# Altium PCB PCB1.PcbDoc
Units mm, origin at the board's own origin, x right, y up, seen from the top; angles counter-clockwise.
Board outline 101.98 x 46.48 mm, 2 copper layers (Top Layer, Bottom Layer); 139 components, 82 nets, 451 pads, 102 vias.
Unrouted connection lines stored in the file: 4.
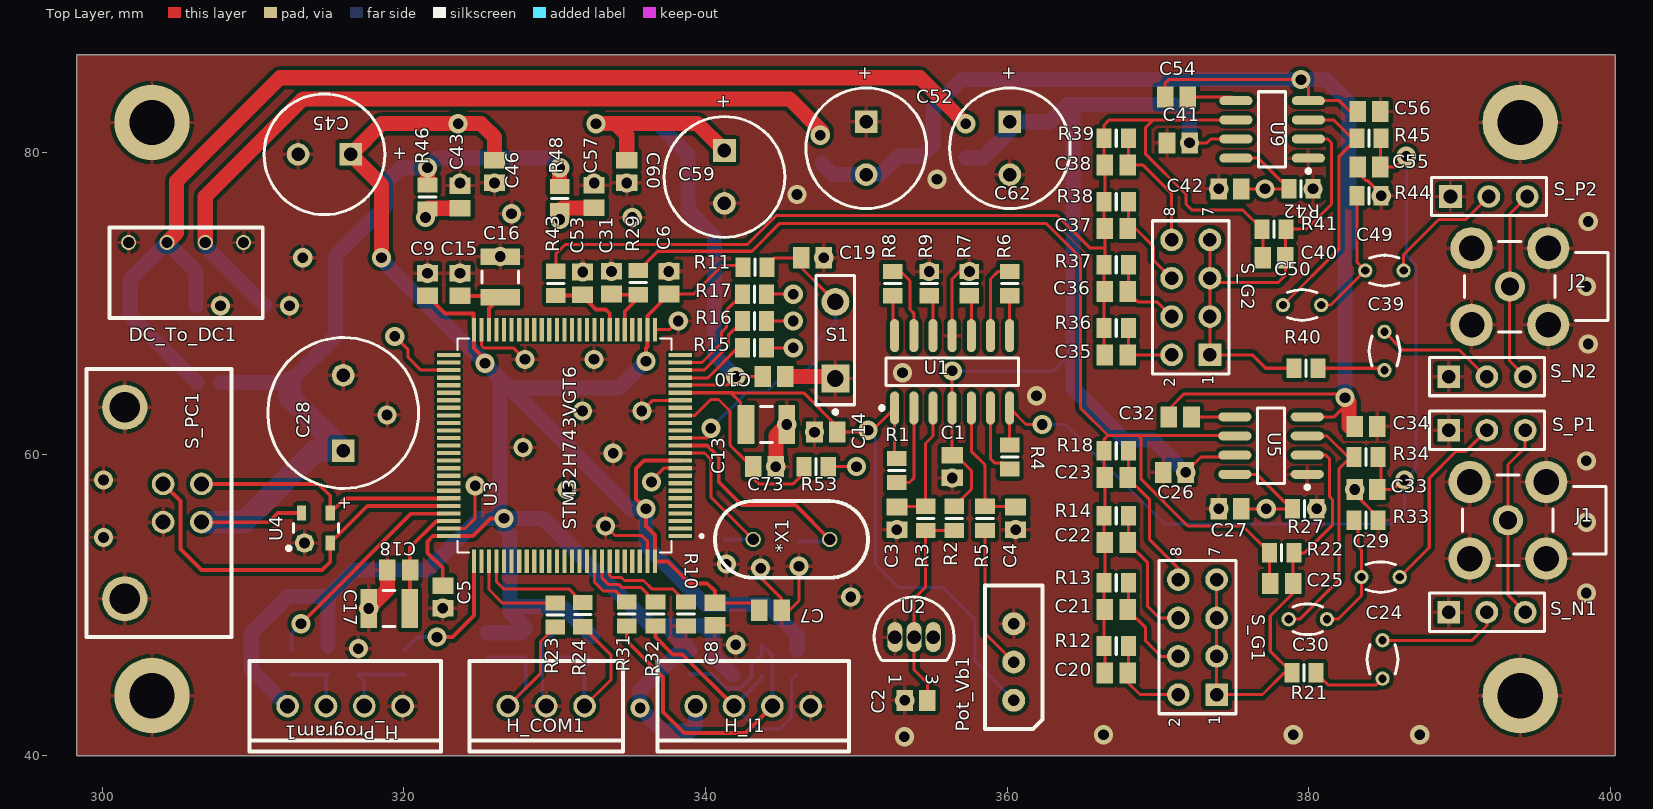
[diagram p0: Top Layer view]
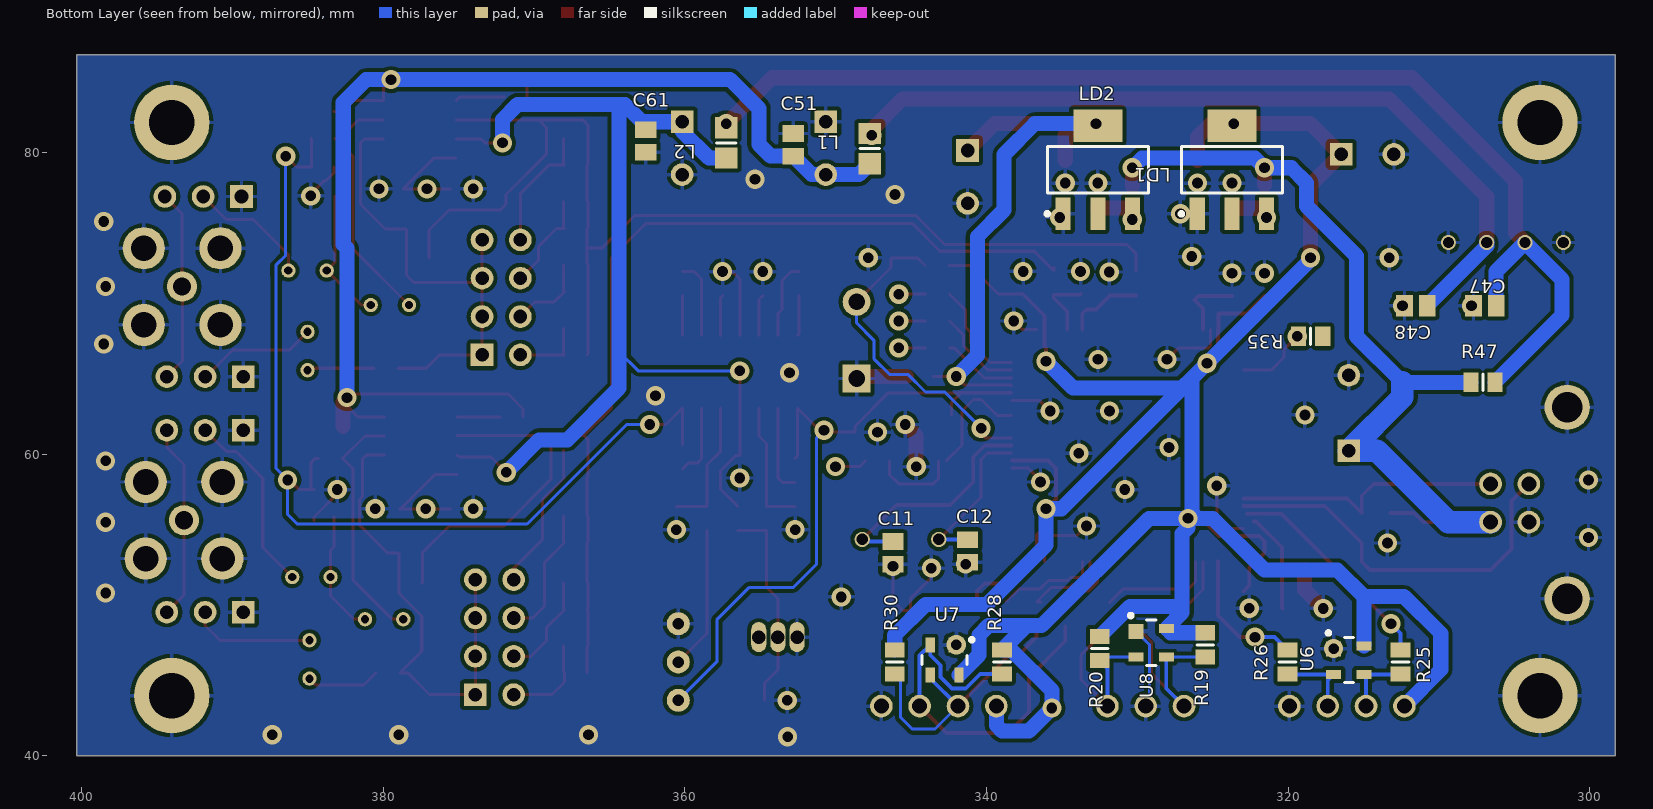
[diagram p1: Bottom Layer view, seen from below]

## Layer stack, top to bottom
Top Solder: solder mask 0.0102, Solder Resist, Dk 3.5
Top Layer: signal copper 0.0356
Dielectric 1: dielectric 0.32, FR-4, Dk 4.8
Bottom Layer: signal copper 0.0356
Bottom Solder: solder mask 0.0102, Solder Resist, Dk 3.5

## Board outline
298.323,40.005 298.323,86.487 400.304,86.487 400.304,40.005

## Design rules (kind name [scope] priority, off if disabled: settings)
Clearance Clearance_1 [HasFootprint('QFP50P1600X1600X160-100N')] p1: gap=0.15 ignorepadtopadclearanceinfootprint=FALSE
Clearance [All] p2: gap=0.254 ignorepadtopadclearanceinfootprint=FALSE except(0: Arc-Hole Track-Hole SMDPad-Hole THPad-Hole Via-Hole Fill-Hole Poly-Hole Region-Hole Text-Hole)
PolygonConnect [All] p1: connectstyle=Relief reliefconductorwidth=0.254 reliefentries=4 polygonreliefangle="90 Angle" airgapwidth=0.254
RoomDefinition Sheet1 [InComponentClass('Sheet1')] p1: confinementstyle=ConfineIn formatcopy=TRUE lockcomponents=FALSE outline 298.335,40.005 400.316,40.005 400.316,86.487 298.335,86.487
RoutingVias [All] p1: holewidth=0.711 width=1.27 viastyle="Through Hole" minholewidth=0.711 minwidth=1.27 maxholewidth=0.711 maxwidth=1.27
SolderMaskExpansion [All] p1: expansion=0.102
Width [All] p1: maxlimit=1.5 minlimit=0.2 preferedwidth=1
30 further rules are at their usual default settings.

## Components (designator, comment, footprint, x,y, rotation, side; value= is the part's Value field where it differs from the comment)
*X1 "XTAl_Large" XTAL_Large 348.246,54.356 r180 top
C1 "Bipolar" C0805 356.362,59.182 r90 top value=100nF
C2 "Bipolar" C0805 353.961,43.688 r0 top value=100nF
C3 "Bipolar" C0805 352.691,55.753 r90 top value=1uF
C4 "Bipolar" C0805 360.565,55.753 r90 top value=100nF
C5 "Bipolar" C0805 322.592,50.546 r90 top value=100nF
C6 "Bipolar" C0805 337.578,71.374 r270 top value=100nF
C7 "Bipolar" C0805 344.309,49.657 r180 top value=100nF
C8 "Bipolar" C0805 340.626,49.403 r90 top value=100nF
C9 "Bipolar" C0805 321.576,71.247 r270 top value=100nF
C10 "Bipolar" C0805 344.551,65.151 r180 top value=100nF
C11 "Bipolar" C0805 346.214,53.467 r90 bottom value=10pF
C12 "Bipolar" C0805 341.261,53.594 r90 bottom value=10pF
C13 "Tan" C1210 344.043,61.976 r180 top value=2.2uF
C14 "Bipolar" C0805 347.98,61.468 r0 top value=100nF
C15 "Bipolar" C0805 323.735,71.247 r270 top value=100nF
C16 "Tan" C1210 326.402,71.755 r270 top value=2.2uF
C17 "Tan" C1210 319.036,49.784 r0 top value=2.2uF
C18 "Bipolar" C0805 319.671,52.324 r0 top value=100nF
C19 "Bipolar" C0805 347.091,73.025 r180 top value=100pF
C20 "Bipolar" C0805 367.235,45.51 r180 top value=100pF
C21 "Bipolar" C0805 367.235,49.701 r180 top value=47pF
C22 "Bipolar" C0805 367.235,54.146 r180 top value=20pF
C23 "Bipolar" C0805 367.235,58.464 r180 top value=10pF
C24 "Bipolar" HA-N3 384.888,46.399 r270 top value=10uF
C25 "Bipolar" C0805 378.206,51.435 r180 top value=4.7pF
C26 "Bipolar" C0805 371.094,58.801 r0 top value=100nF
C27 "Bipolar" C0805 374.777,56.388 r0 top value=100nF
C28 "94SA107X0020FBP" F 315.988,62.738 r90 top value=100uF
C29 "Bipolar" HA-N3 384.761,51.86 r180 top value=10uF
C30 "Bipolar" HA-N3 379.935,49.066 r180 top value=10uF
C31 "Bipolar" C0805 333.768,71.374 r270 top value=100pF
C32 "Bipolar" C0805 371.475,62.484 r0 top value=2.2pF
C33 "Bipolar" C0805 383.794,57.658 r0 top value=100nF
C34 "Bipolar" C0805 383.794,61.849 r0 top value=100nF
C35 "Bipolar" C0805 367.235,66.592 r180 top value=100pF
C36 "Bipolar" C0805 367.235,70.783 r180 top value=47pF
C37 "Bipolar" C0805 367.235,74.974 r180 top value=20pF
C38 "Bipolar" C0805 367.235,79.165 r180 top value=10pF
C39 "Bipolar" HA-N3 385.015,66.846 r270 top value=10uF
C40 "Bipolar" C0805 377.698,73.025 r180 top value=4.7pF
C41 "Bipolar" C0805 371.348,80.645 r0 top value=100nF
C42 "Bipolar" C0805 374.777,77.597 r0 top value=100nF
C43 "SMD" C0805 323.735,77.063 r90 top value=100nf
C45 "470uf/10v" CAPPR3.5-8X11.5 314.746,79.883 r180 top value=470uF
C46 "SMD" C0805 326.021,78.74 r270 top value=100nf
C47 "Bipolar" C0805 306.971,69.85 r180 bottom value=100nF
C48 "Bipolar" C0805 311.543,69.85 r180 bottom value=100nF
C49 "Bipolar" HA-N3 385.015,72.18 r180 top value=10uF
C50 "Bipolar" HA-N3 379.554,69.894 r180 top value=10uF
C51 "Bipolar" C0805 352.818,80.518 r270 bottom value=100nF
C52 "470uf/10v" CAPPR3.5-8X11.5 350.659,80.292 r270 top value=470uF
C53 "Bipolar" C0805 331.863,71.336 r270 top value=100pF
C54 "Bipolar" C0805 371.221,83.693 r0 top value=2.2pF
C55 "Bipolar" C0805 383.999,79.038 r0 top value=100nF
C56 "Bipolar" C0805 383.999,82.721 r0 top value=100nF
C57 "SMD" C0805 332.625,77.089 r90 top value=100nf
C59 "470uf/10v" CAPPR3.5-8X11.5 341.261,78.387 r270 top value=470uF
C60 "SMD" C0805 334.784,78.74 r270 top value=100nf
C61 "Bipolar" C0805 362.597,80.772 r90 bottom value=100nF
C62 "470uf/10v" CAPPR3.5-8X11.5 360.184,80.292 r270 top value=470uF
C73 "Bipolar" C0805 343.916,59.182 r180 top value=100pF
DC_To_DC1 "DC_To_DC" DC_To_DC 301.764,74.041 r0 top
H_COM1 "Header_3Pin" Header_3Pin 331.99,43.307 r180 top
H_I1 "Header_4Pin" Header_4Pin 346.976,43.307 r180 top
H_Program1 "Header_4Pin" Header_4Pin 319.925,43.307 r180 top
J1 "COAX-F" MCX5.08-H5 393.204,55.626 r180 top
J2 "COAX-F" MCX5.08-H5 393.331,71.12 r180 top
L1 "Inductor" 6-0805_M 347.738,80.264 r270 bottom value=10uH
L2 "Inductor" 6-0805_M 357.263,80.645 r270 bottom value=10uH
LD1 "LD33" SOT230P 323.735,78.863 r90 bottom
LD2 "LD33" SOT230P 332.625,78.867 r90 bottom
Pot_Vb1 "10k" MultiTurn 360.438,43.688 r90 top
R1 "Res1" 6-0805_L 352.691,58.928 r90 top value=4.7K
R2 "Res1" 6-0805_L 356.501,55.753 r90 top value=10K
R3 "Res1" 6-0805_L 354.596,55.753 r90 top value=4.7K
R4 "Res1" 6-0805_L 360.172,59.817 r90 top value=4.7K
R5 "Res1" 6-0805_L 358.533,55.753 r90 top value=4.7K
R6 "Res1" 6-0805_L 360.167,71.31 r270 top value=4.7K
R7 "Res1" 6-0805_L 357.5,71.31 r270 top value=4.7K
R8 "Res1" 6-0805_L 352.42,71.31 r270 top value=4.7K
R9 "Res1" 6-0805_L 354.833,71.31 r270 top value=4.7K
R10 "Res1" 6-0805_L 338.709,49.403 r270 top value=47K
R11 "Res1" 6-0805_L 343.281,72.39 r180 top value=10K
R12 "Res1" 6-0805_L 367.235,47.288 r180 top value=1K
R13 "Res1" 6-0805_L 367.235,51.479 r180 top value=2.2K
R14 "Res1" 6-0805_L 367.235,55.924 r180 top value=4.7K
R15 "Res1" 6-0805_L 343.255,67.056 r180 top value=330
R16 "Res1" 6-0805_L 343.255,68.834 r180 top value=330
R17 "Res1" 6-0805_L 343.255,70.612 r180 top value=330
R18 "Res1" 6-0805_L 367.235,60.242 r180 top value=10K
R19 "Res1" 6-0805_L 325.513,47.371 r90 bottom value=10k
R20 "Res1" 6-0805_L 332.498,47.117 r90 bottom value=10k
R21 "Res1" 6-0805_L 379.681,45.51 r180 top value=1K
R22 "Res1" 6-0805_L 378.206,53.467 r180 top value=20K
R23 "Res1" 6-0805_L 330.041,49.342 r270 top value=330
R24 "Res1" 6-0805_L 331.863,49.365 r270 top value=330
R25 "Res1" 6-0805_L 312.559,46.228 r90 bottom value=330
R26 "Res1" 6-0805_L 320.052,46.228 r90 bottom value=330
R27 "Res1" 6-0805_L 379.73,56.388 r180 top value=10K
R28 "Res1" 6-0805_L 338.975,46.228 r90 bottom value=4.7k
R29 "Res1" 6-0805_L 335.546,71.374 r90 top value=100
R30 "Res1" 6-0805_L 346.087,46.228 r90 bottom value=4.7k
R31 "Res1" 6-0805_L 334.784,49.403 r90 top value=330
R32 "Res1" 6-0805_L 336.689,49.403 r90 top value=330
R33 "Res1" 6-0805_L 383.794,55.626 r180 top value=1K
R34 "Res1" 6-0805_L 383.794,59.817 r180 top value=10K
R35 "Res1" 6-0805_L 318.516,67.818 r0 bottom value=330
R36 "Res1" 6-0805_L 367.235,68.37 r180 top value=1K
R37 "Res1" 6-0805_L 367.235,72.561 r180 top value=2.2K
R38 "Res1" 6-0805_L 367.235,76.752 r180 top value=4.7K
R39 "Res1" 6-0805_L 367.235,80.943 r180 top value=10K
R40 "Res1" 6-0805_L 379.808,65.703 r180 top value=1K
R41 "Res1" 6-0805_L 377.698,74.93 r180 top value=20K
R42 "Res1" 6-0805_L 379.476,77.597 r180 top value=10K
R43 "Res1" 6-0805_L 330.085,71.336 r90 top value=100
R44 "Res1" 6-0805_L 383.999,77.133 r180 top value=1K
R45 "Res1" 6-0805_L 383.999,80.943 r180 top value=10K
R46 "Res1" 6-0805_L 321.576,77.063 r270 top value=0
R47 "Res1" 6-0805_L 307.098,64.77 r180 bottom value=0
R48 "Res1" 6-0805_L 330.339,76.962 r270 top value=0
R53 "Res1" 6-0805_L 347.345,59.182 r0 top value=100
S1 "SW-PB" SPST-2 348.615,67.564 r90 top
S_G1 "Gain_Selector" HDR2X4 373.888,44.069 r90 top
S_G2 "Gain_Selector" HDR2X4 373.446,66.592 r90 top
S_N1 "Input_Selector" HDR1X3 389.267,49.53 r0 top
S_N2 "Input_Selector" HDR1X3 389.267,65.151 r0 top
S_P1 "Input_Selector" HDR1X3 389.267,61.595 r0 top
S_P2 "Input_Selector" HDR1X3 389.394,77.089 r0 top
S_PC1 "USB_Type_B" USB_Type_B 306.59,55.499 r270 top
U1 "LM324AD" SO14_N 356.357,65.468 r90 top
U2 "LM336BZ_2V5" TO92 353.834,47.879 r270 top
U3 "STM32H743VGT6" QFP50P1600X1600X160-100N 330.653,60.579 r180 top
U4 "PRTR5V" SOT143L 314.179,55.118 r90 top
U5 "AD8021" SO8_N 377.5,60.579 r180 top
U6 "PRTR5V" SOT143L 315.988,46.355 r180 bottom
U7 "PRTR5V" SOT143L 342.785,46.355 r270 bottom
U8 "PRTR5V" SOT143L 329.085,47.51 r180 bottom
U9 "AD8021" SO8_N 377.571,81.534 r180 top

## Footprints (in the part's own frame and the unit in brackets; to place one, negate y for a bottom-side part, rotate by r counter-clockwise, add the part's x,y. Pads: shape width x height; smd on the part's side, far side on the other; paste and mask are expansions set on the pad)
6-0805_L [mm] "Chip Resistor, Body 2.0x1.2mm, IPC High Density"
  rect 1x1.3 smd: 1(-0.8,0) 2(0.8,0)
  silkscreen extent 0,-0.55 0,0.55, body extent -1.07,-0.7 1.07,0.7, height 0.7
6-0805_M [mm] "Chip Resistor, Body 2.0x1.2mm, IPC Low Density"
  rect 1.4x1.5 smd: 1(-1,0) 2(1,0)
  silkscreen extent 0,-0.65 0,0.65, body extent -1.07,-0.7 1.07,0.7, height 0.7
C0805 [mm] "Chip Capacitor, Body 2.0x1.3mm, IPC High Density"
  rect 1.1x1.4 smd: 1(-0.75,0) 2(0.75,0)
  body extent -1.1,-0.72 1.1,0.72, height 1.4
C1210 [mm] "Chip Capacitor, Body 3.2x2.5mm, IPC High Density"
  rect 1.1x2.6 smd: 1(-1.35,0) 2(1.35,0)
  silkscreen extent -0.4,-1.2 0.4,1.2, body extent -1.7,-1.35 1.7,1.35, height 1.3
CAPPR3.5-8X11.5 [mm] "Capacitor, Electrolytic, Radial; Body 8 x 11.5 mm (Dia.xH typ); Pin Spacing 3.5 mm (typ)"
  rect 1.5x1.5 hole 0.9: 1(-1.75,0)
  round 1.5 hole 0.9: 2(1.75,0)
  silkscreen extent -4,-4 4,4
DC_To_DC [mm]
  round 1 hole 0.75: 0(0,0) 1(2.54,0) 2(5.08,0) 3(7.62,0)
  silkscreen extent -1.27,-5 8.89,1
F [mm] "Capacitor, Electrolytic, Radial; Body 10 x 10.5 mm (Dia.xH typ); Pin Spacing 5 mm (typ)"
  rect 1.5x1.5 hole 0.9: 1(-2.5,0)
  round 1.5 hole 0.9: 2(2.5,0)
  silkscreen extent -5,-5 5,5
HA-N3 [mm] "Capacitor, Radial, Tantalum, Non-Polarised; Body 3.56 x 2.03 x 5.08 mm (WxTxH max); Pin Spacing 2.54 mm (typ)"
  round 0.95 hole 0.55: 1(-1.27,0) 2(1.27,0)
  silkscreen extent -0.98,-1.02 0.98,1.02
HDR1X3 [mm] "Connector; Header; 3 Position"
  rect 1.5x1.5 hole 0.9: 1(0,0)
  round 1.5 hole 0.9: 2(2.54,0) 3(5.08,0)
  silkscreen extent -1.27,-1.27 6.35,1.27
HDR2X4 [mm] "Connector; Header; 4x2 Position"
  rect 1.5x1.5 hole 0.9: 1(0,0)
  round 1.5 hole 0.9: 2(0,2.54) 3(2.54,0) 4(2.54,2.54) 5(5.08,0) 6(5.08,2.54) 7(7.62,0) 8(7.62,2.54)
  silkscreen extent -1.27,-1.27 8.89,3.81
Header_3Pin [mm]
  round 1.5 hole 1: 0(0,0) 1(2.54,0) 2(5.08,0)
  silkscreen extent -2.54,-3 7.62,3
Header_4Pin [mm]
  round 1.5 hole 1: 0(0,0) 1(2.54,0) 2(5.08,0) 3(7.62,0)
  silkscreen extent -2.54,-3 10.16,3
MCX5.08-H5 [mm] "Connector; RF Coaxial, MCX, Thru-Hole; 5 Position; Right-Angle"
  round 2 hole 1.2: 1(0,0)
  round 2.8 hole 1.7: 2(-2.54,-2.54) 3(2.54,-2.54) 4(2.54,2.54) 5(-2.54,2.54)
  silkscreen extent -6.5,-3 3,3
MultiTurn [mil] "Right"
  round 60 hole 30: 0(0,0) 1(100,0) 2(200,0)
  silkscreen extent -75,-75 300,75
QFP50P1600X1600X160-100N [mm]
  rrect7% 1.56x0.28 smd: 1(-7.68,6) 2(-7.68,5.5) 3(-7.68,5) 4(-7.68,4.5) 5(-7.68,4) 6(-7.68,3.5) 7(-7.68,3) 8(-7.68,2.5) 9(-7.68,2) 10(-7.68,1.5) 11(-7.68,1) 12(-7.68,0.5) 13(-7.68,0) 14(-7.68,-0.5) 15(-7.68,-1) 16(-7.68,-1.5) 17(-7.68,-2) 18(-7.68,-2.5) 19(-7.68,-3) 20(-7.68,-3.5) 21(-7.68,-4) 22(-7.68,-4.5) 23(-7.68,-5) 24(-7.68,-5.5) 25(-7.68,-6) 51(7.68,-6) 52(7.68,-5.5) 53(7.68,-5) 54(7.68,-4.5) 55(7.68,-4) 56(7.68,-3.5) 57(7.68,-3) 58(7.68,-2.5) 59(7.68,-2) 60(7.68,-1.5) 61(7.68,-1) 62(7.68,-0.5) 63(7.68,0) 64(7.68,0.5) 65(7.68,1) 66(7.68,1.5) 67(7.68,2) 68(7.68,2.5) 69(7.68,3) 70(7.68,3.5) 71(7.68,4) 72(7.68,4.5) 73(7.68,5) 74(7.68,5.5) 75(7.68,6)
  rrect7% 0.28x1.56 smd: 26(-6,-7.68) 27(-5.5,-7.68) 28(-5,-7.68) 29(-4.5,-7.68) 30(-4,-7.68) 31(-3.5,-7.68) 32(-3,-7.68) 33(-2.5,-7.68) 34(-2,-7.68) 35(-1.5,-7.68) 36(-1,-7.68) 37(-0.5,-7.68) 38(0,-7.68) 39(0.5,-7.68) 40(1,-7.68) 41(1.5,-7.68) 42(2,-7.68) 43(2.5,-7.68) 44(3,-7.68) 45(3.5,-7.68) 46(4,-7.68) 47(4.5,-7.68) 48(5,-7.68) 49(5.5,-7.68) 50(6,-7.68) 76(6,7.68) 77(5.5,7.68) 78(5,7.68) 79(4.5,7.68) 80(4,7.68) 81(3.5,7.68) 82(3,7.68) 83(2.5,7.68) 84(2,7.68) 85(1.5,7.68) 86(1,7.68) 87(0.5,7.68) 88(0,7.68) 89(-0.5,7.68) 90(-1,7.68) 91(-1.5,7.68) 92(-2,7.68) 93(-2.5,7.68) 94(-3,7.68) 95(-3.5,7.68) 96(-4,7.68) 97(-4.5,7.68) 98(-5,7.68) 99(-5.5,7.68) 100(-6,7.68)
  silkscreen extent -9.2,-7.1 7.1,7.1, body extent -8,-8 8,8, height 0.72
SO8_N [mm] "SOIC, 8-Leads, Body 4.9x3.9mm, Pitch 1.27mm, IPC Medium Density"
  oval 2.2x0.6 smd: 1(-2.4,1.905) 2(-2.4,0.635) 3(-2.4,-0.635) 4(-2.4,-1.905) 5(2.4,-1.905) 6(2.4,-0.635) 7(2.4,0.635) 8(2.4,1.905)
  silkscreen extent -2.53,-2.5 0.9,2.88, body extent -1.95,-2.45 1.95,2.45, height 1.75
SO14_N [mm] "SOIC, 14-Leads, Body 8.7x3.9mm, Pitch 1.27mm, IPC Medium Density"
  oval 2.2x0.6 smd: 1(-2.4,3.81) 2(-2.4,2.54) 3(-2.4,1.27) 4(-2.4,0) 5(-2.4,-1.27) 6(-2.4,-2.54) 7(-2.4,-3.81) 8(2.4,-3.81) 9(2.4,-2.54) 10(2.4,-1.27) 11(2.4,0) 12(2.4,1.27) 13(2.4,2.54) 14(2.4,3.81)
  silkscreen extent -2.52,-4.4 0.9,4.78, body extent -1.95,-4.33 1.95,4.33, height 1.75
SOT143L [mm] "SOT143, 4-Leads, Body 2.9x1.3mm, Pitch 1.9mm, Lead Span 2.5mm, IPC High Density"
  rect 1x1 smd: 1(-1,0.75)
  rect 1x0.6 smd: 2(-1,-0.95) 3(1,-0.95) 4(1,0.95)
  silkscreen extent -1.47,-1.5 0.3,1.92, body extent -0.7,-1.52 0.7,1.52, height 1.1
SOT230P [mm] "SOT223, 4-Leads, Body 6.50x7.00mm (avg), Pitch 2.30mm, IPC Medium Density"
  rect 2.15x1 smd: 1(-2.925,2.3) 2(-2.925,0) 3(-2.925,-2.3)
  rect 2.15x3.25 smd: 4(2.925,0)
  silkscreen extent -3.05,-3.35 1.55,3.48, body extent -1.85,-3.35 1.85,3.35, height 1.8
SPST-2 [mm] "Switch; 2 Leads"
  rect 1.85x1.85 hole 1.1: 1(-2.54,0)
  round 1.85 hole 1.1: 2(2.54,0)
  silkscreen extent -4.89,-1.27 4.28,1.27
TO92 [mm] "TO, Flat Index; 3 In-Line, Axial Leads; Body Dia. 4.8mm; Leads 0.51 x 0.51 mm (max)"
  oval 2x1 hole 0.9: 1(0,-1.27) 2(0,0) 3(0,1.27)
  silkscreen extent -2.65,-2.65 1.55,2.65
USB_Type_B [mm]
  round 1.5 hole 1: 0(0,0) 1(-2.54,0) 2(-2.54,-2.54) 3(0,-2.54)
  round 3 hole 2: 4(5.08,-5.08) 5(-7.62,-5.08)
  silkscreen extent -10.16,-7.62 7.62,2
XTAL_Large [mil]
  round 40 hole 30: 0(0,0) 1(200,0)
  silkscreen extent -100,-100 300,100

## Part data
C1 C2 C3 C4 C5 C6 C7 C8 C9 C10 C11 C12 C13 C14 C15 C16 C17 C18 C19 C20 C21 C22 C23 C24 C25 C26 C27 C29 C30 C31 C32 C33 C34 C35 C36 C37 C38 C39 C40 C41 C42 C47 C48 C49 C50 C51 C53 C54 C55 C56 C61 C73: library part Cap, "Capacitor", LatestRevisionDate=17-Jul-2002, LatestRevisionNote="Re-released for DXP Platform.", PackageDescription="Radial Cap, Thru-Hole; 2 Leads; 0.3 in Pin Spacing", PackageReference=RAD-0.3, Published=8-Jun-2000, Publisher="Altium Limited"
C28: "Solid Aluminum Capacitor with Organic Semiconductor Electrolyte: 100uF, 20V, Bulk Pack", ComponentLink1Description="Manufacturer Link", ComponentLink1URL=http://www.vishay.com/, ComponentLink2Description=Datasheet, ComponentLink2URL=http://www.vishay.com/docs/90003/94sa.pdf, DatasheetDocument=29-Jun-2001, DrillSize="Nominal, Rounded to the nearest 0.1mm", Note="Part Numbers shown are for ± 20% capacitance tolerance (X0).", PackageReference=F, PCB_Layout="Complies with Manufacturer's Recommendation.", Published=19-Mar-2004, Publisher="Altium Limited"
C43 C46 C57 C60: library part "Cap Pol3", "Polarized Capacitor (Surface Mount)", LatestRevisionDate=29-May-2009, LatestRevisionNote="IPC-7351 Footprint Added.", PackageDescription="Chip Capacitor", PackageReference=C0805, Published=8-Jun-2000, Publisher="Altium Limited"
C45 C52 C59 C62: library part EKA00DC347D00, "Aluminum Electrolytic Capacitor, Radial Style with Long Leads: 470uF, 16V", ComponentLink1Description="Manufacturer Link", ComponentLink1URL=http://www.vishay.com/, ComponentLink2Description=Datasheet, ComponentLink2URL=http://www.vishay.com/docs/25014/eka.pdf, DatasheetDocument=20-Feb-2001, DrillSize="Nominal, Rounded To The Nearest 0.1mm", Note="Refer to Manufacturer's Data Sheets for other lead formations", PackageReference=CAPPR3.5-8X11.5, Published=19-Mar-2004, Publisher="Altium Limited"
J1 J2: "RF Coaxial PCB Connector, MCX; Thru-Hole, Right-Angle Mount Socket, Blunt Post Terminal, 50 Ohm Impedance", PackageDocument=04-Jul-1999, ComponentLink1Description="Manufacturer Link", ComponentLink1URL=http://www.amphenolrf.com/, DatasheetDocument=30-May-2003, DrillSize="Corresponds to nominal value.", LatestRevisionDate=15-Jul-2004, LatestRevisionNote="Component Replaced.", PackageReference=919-119J-51AX, PCB_Layout="Complies with manufacturer's recommendation.", Published=15-Jul-2004, Publisher="Altium Limited"
Pot_Vb1: library part Pot
R1 R2 R3 R4 R5 R6 R7 R8 R9 R10 R11 R12 R13 R14 R15 R16 R17 R18 R19 R20 R21 R22 R23 R24 R25 R26 R27 R28 R29 R30 R31 R32 R33 R34 R35 R36 R37 R38 R39 R40 R41 R42 R43 R44 R45 R46 R47 R48 R53: "Resistor", LatestRevisionDate=17-Jul-2002, LatestRevisionNote="Re-released for DXP Platform.", PackageDescription="Axial Device, Thru-Hole; 2 Leads; 0.3 in Pin Spacing", PackageReference=AXIAL-0.3, Published=8-Jun-2000, Publisher="Altium Limited"
S1: "Switch", LatestRevisionDate=17-Jul-2002, LatestRevisionNote="Re-released for DXP Platform.", PackageDescription="Switch; 2 Leads", PackageReference=SPST-2, Published=24-Mar-1999, Publisher="Altium Limited"
S_G1 S_G2: library part "Header 4X2", "Header, 4-Pin, Dual row", LatestRevisionDate=17-Jul-2002, LatestRevisionNote="Re-released for DXP Platform.", Publisher="Altium Limited"
S_N1 S_N2 S_P1 S_P2: library part "Header 3", "Header, 3-Pin", LatestRevisionDate=17-Jul-2002, LatestRevisionNote="Re-released for DXP Platform.", Publisher="Altium Limited"
U1: "Low-Power Quad Operational Amplifier", Code_IPC=SOIC127P600-14, ComponentLink1Description="Manufacturer Link", ComponentLink1URL=http://www.st.com/, ComponentLink2Description=Datasheet, ComponentLink2URL=http://www.st.com/stonline/products/literature/ds/4797/lm224a.pdf, DatasheetVersion=Nov-1997, LatestRevisionDate=13-Apr-2006, LatestRevisionNote="IPC-7351 Footprint Added.", PackageDescription="14-Pin Small Outline Integrated Circuit 1.27 mm Pitch", PackageReference=SO14, PackageVersion=Sep-1998, Published=24-Aug-2001, Publisher="Altium Limited"
U2: library part LM336BZ, "2.5V Voltage Reference", ComponentLink1Description="Manufacturer Link", ComponentLink1URL=http://www.st.com/, ComponentLink2Description=Datasheet, ComponentLink2URL=http://www.st.com/stonline/products/literature/ds/2166/lm336.pdf, DatasheetVersion=Oct-1997, LatestRevisionDate=17-Jul-2002, LatestRevisionNote="Re-released for DXP Platform.", PackageDescription="TO, Flat Index; 3 In-Line, Axial Leads; Body Dia. 4.8mm; Leads 0.51 x 0.51 mm (max)", PackageReference=TO92, Published=24-Aug-2001, Publisher="Altium Limited"
U3: "ARM® Cortex®-M7 STM32H7 Microcontroller IC 32-Bit Single-Core 480MHz 1MB (1M x 8) FLASH 100-LQFP (14x14)", Package=None, Check_prices=https://www.snapeda.com/parts/STM32H743VGT6/STMicroelectronics/view-part/?ref=eda, MF=STMicroelectronics, MP=STM32H743VGT6, SnapEDA_Link=https://www.snapeda.com/parts/STM32H743VGT6/STMicroelectronics/view-part/?ref=snap
U5 U9: library part MC33001D, "General-Purpose Single J-FET Operational Amplifier", Code_IPC=SOIC127P600-8, Code_JEDEC=MS-012-AA, ComponentLink1Description="Manufacturer Link", ComponentLink1URL=http://www.st.com/, DatasheetVersion=Apr-1995, LatestRevisionDate=13-Apr-2006, LatestRevisionNote="IPC-7351 Footprint Added.", PackageDescription="8-Pin Small Outline Integrated Circuit 1.27 mm Pitch", PackageReference=SO8, PackageVersion=Dec-2002, Published=24-Aug-2001, Publisher="Altium Limited"
L1 L2: Code_IEC=1005, Code_JEITA=0402, LatestRevisionDate=29-May-2009, LatestRevisionNote="IPC-7351 Footprint Added.", PackageDescription="Chip Inductor", PackageReference=0402-A, Published=8-Jun-2000, Publisher="Altium Limited"

## Free pads (board coordinates)
  round 5 hole 3: 4(303.314,44) 5(303.314,82) 6(394.012,82) 7(394.012,44)

## Via types
v1: diameter 1.27, hole 0.711, Top Layer to Bottom Layer, 102 vias

## Nets (pads, with @x,y where several pads share a name; then routed paths per layer and width w, separated by ;. In a path a pad name is that pad's centre, name@x,y a point inside that pad or via, vN(x,y) a via of type N, cw(c..) or ccw(c..) an arc to the next point about the centre after c; other vN are vias at no path point)
ADC_Ch1: C31.2 R29.1 U3.30 | length 4.5
  Top Layer w0.254: C31.2 333.818,70.574 R29.1 335.546,70.358 334.653,69.465 U3.30
ADC_Ch2: C53.2 R43.1 U3.32 | length 5.1
  Top Layer w0.254: R43.1 331.813,70.536 332.753,69.596 333.387,69.596 333.653,69.33 U3.32
ADC_Ch3_Direct: C73.2 R53.1 U3.17 | length 13.5
  Top Layer w0.2: U3.17 339.312,62.579 340.358,63.625 340.87,63.625 341.63,62.865 341.63,60.603 C73.2@342.67,59.563 ; C73.2@343.178,59.563 343.178,58.396 343.535,58.039 345.821,58.039 346.43,58.648 R53.1@346.43,59.563
ADC_Ch3_Direct_In: R53.2 | length 2.1
  Top Layer w0.2: R53.2@348.03,59.563 348.411,59.182 v1(350.012,59.182)
AVCC: C1.2 C26.2 C41.2 C61.2 C62.1 L2.2 R2.2 U1.4 U5.7 U9.7 | length 72.7
  Top Layer w0.2: v1@356.357,65.273 U1.4 356.362,63.063 C1.2 356.613,59.932 357.632,58.913 357.632,57.684 R2.2 ; v1(371.844,58.801) 372.86,59.817 374.973,59.817 U5.7 ; v1(372.098,80.645) 373.253,80.645 373.507,80.899 U9.7
  Bottom Layer w0.2: v1(356.362,65.532) 363.093,65.532 364.363,66.802
  Bottom Layer w1: L2.2 358.41,79.645 360.184,81.419 C62.1 362.839,82.042 363.982,83.185 ; v1(371.844,58.801) 369.685,60.96 367.792,60.96 364.363,64.389 364.363,66.802 364.363,82.804 363.982,83.185 ; v1(372.098,80.645) 372.098,82.181 371.094,83.185 363.982,83.185
AVCC_3V3: C10.2 C59.1 C60.1 LD2.2 LD2.4 U3.21 | length 40.5
  Top Layer w0.2: U3.21@338.379,64.533 U3.21 341.439,64.579 v1(342.011,65.151) C10.2@343.547,65.151
  Top Layer w1: v1(332.752,81.915) 334.022,81.915 ; C60.1 334.784,81.153 334.022,81.915 ; C59.1 339.483,81.915 334.022,81.915
  Bottom Layer w1: v1(332.752,81.915) 336.804,81.915 338.836,79.883 338.836,76.2 340.614,74.422 340.614,66.548 v1(342.011,65.151)
AVEE: C32.1 C34.1 C51.2 C52.2 C54.1 C56.1 L1.2 U5.4 U9.4 | length 92.6
  Top Layer w0.2: C54.1 370.471,84.594 370.713,84.836 v1(379.476,84.836) 379.971,84.341 U9.4 382.016,83.439 382.734,82.721 C56.1 ; C32.1 370.725,63.004 371.729,64.008 382.143,64.008 v1(382.397,63.754) 382.675,63.476 381.683,62.484 U5.4
  Top Layer w1: C34.1@382.675,61.849 v1@382.675,63.476
  Bottom Layer w1: L1.2 348.46,78.542 C52.2 351.592,78.542 C51.2 354.318,79.768 355.092,80.542 355.092,82.931 356.997,84.836 v1(379.476,84.836) 381.127,84.836 382.651,83.312 382.651,73.914 382.397,73.66 v1(382.397,63.754)
DVCC_3V3: C5.2 C6.2 C7.2 C8.2 C9.2 C45.1 C46.1 H_I1.3 H_Program1.3 LD1.2 LD1.4 R11.2 R19.2 R20.2 R28.2 R30.2 U3.11 U3.27 U3.50 U3.75 U3.100 U6.4 U7.4 U8.4 | length 205.5
  Top Layer w0.2: C6.2@337.578,70.612 339.217,70.612 341.122,72.517 R11.2@342.481,72.517 ; C8.2 343.063,50.153 C7.2
  Top Layer w0.254: C9.2 322.731,69.342 324.624,69.342 324.624,68.288 U3.50 324.653,67.027 325.386,66.294 v1(325.386,66.04) ; C5.2@322.973,50.915 C5.2 322.592,52.451 321.576,53.467 321.576,54.229 321.926,54.579 U3.75 324.581,54.579 325.755,55.753 v1(326.644,55.753) ; v1(336.054,66.167) 336.054,67.056 336.153,67.155 U3.27 336.153,69.187 C6.2@337.578,70.612 ; U3.11 335.931,59.579 335.407,59.055 335.407,57.035 v1(336.054,56.388) 336.054,55.245 336.653,54.646 U3.100 337.499,52.899 338.963,51.435 340.118,51.435 340.626,50.927 C8.2
  Top Layer w1: v1(318.528,73.025) 318.528,77.851 C45.1 318.528,81.915 v1(323.608,81.915) 325.132,81.915 326.021,81.026 C46.1
  Bottom Layer w1: H_Program1.3 309.892,45.72 309.892,48.133 312.321,50.562 314.988,50.562 ; U6.4 314.988,50.562 ; v1(318.528,73.025) 318.528,72.898 v1(325.386,66.04) 326.39,65.036 ; R19.2 327.796,48.171 U8.4 327.037,49.508 ; R20.2 330.504,49.911 327.44,49.911 327.037,49.508 ; v1(336.054,66.167) 334.276,64.389 327.037,64.389 ; H_I1.3 339.356,42.037 338.975,41.656 337.197,41.656 v1(335.673,43.18) 335.673,44.342 338.359,47.028 R28.2 337.362,48.641 ; U7.4 340.499,46.691 340.499,48.006 339.864,48.641 337.362,48.641 ; R30.2 346.087,48.006 344.055,50.038 339.991,50.038 336.054,53.975 v1(336.054,56.388) 335.038,56.388 327.037,64.389 ; 314.988,50.562 316.75,52.324 321.576,52.324 325.005,55.753 v1@326.021,55.753 ; v1@326.021,55.753 326.39,56.122 326.39,65.036 ; v1@326.021,55.753 v1(326.644,55.753) ; 326.39,65.036 327.037,64.389 ; v1(326.644,55.753) 329.234,55.753 336.346,48.641 337.362,48.641 ; v1(326.644,55.753) 326.644,55.13 327.037,54.737 327.037,49.508
GND: C1.1 C2.1 C3.1 C4.1 C5.1 C6.1 C7.1 C8.1 C9.1 C10.1 C11.1 C12.1 C13.1 C14.1 C15.1 C16.1 C17.1 C18.1 C19.1 C26.1 C27.1 C28.2 C31.1 C33.1 C34.2 C41.1 C42.1 C43.2 C45.2 C46.2 C47.1 C48.1 C51.1 C52.1 C53.1 C55.1 C56.2 C57.2 C59.2 C60.2 C61.1 C62.2 C73.1 DC_To_DC1.0 DC_To_DC1.3 H_COM1.1 H_I1.0 H_Program1.0 J1.2 J1.3 J1.4 J1.5 J2.2 J2.3 J2.4 J2.5 LD1.1 LD2.1 pad.4 pad.5 pad.6 pad.7 Pot_Vb1.2 R7.1 R9.1 R10.2 R27.1 R33.1 R42.1 R44.1 S1.1 S_N1.1 S_N2.1 S_P1.1 S_P2.1 S_PC1.3 S_PC1.4 S_PC1.5 U1.11 U2.1 U3.10 U3.19 U3.26 U3.49 U3.74 U3.99 U4.1 U5.1 U6.1 U7.1 U8.1 U9.1 | length 52.4
  Top Layer w0.2: U3.74 324.065,55.079 324.739,55.753 v1(324.739,57.912) ; U3.49 325.153,67.207 325.326,67.034 327.301,67.034 v1(328.041,66.294) ; v1(333.375,55.245) 334.01,54.61 335.788,54.61 336.153,54.245 U3.99 ; v1(335.788,62.865) 336.502,63.579 U3.19 ; v1(336.423,58.166) 336.423,58.271 337.231,59.079 U3.10 ; U3.26 337.626,68.259 v1(338.201,68.834) ; v1(343.662,52.451) 343.662,51.816 345.059,50.419 C7.1 345.567,49.657 346.202,50.292 v1(346.202,52.578) ; U1.11 356.357,71.623 356.844,72.11 v1(357.5,72.11) ; v1(383.044,57.658) 383.044,57.392 384.594,55.842 R33.1 ; C55.1 383.249,78.683 383.795,78.137 383.899,78.137 384.799,77.237 v1(384.799,77.133)
  Top Layer w1: v1(317.686,49.784) 318.921,51.019 C18.1 ; v1(344.666,59.182) 344.666,61.249 v1(345.393,61.976) ; C10.1 348.488,65.151 S1.1
  Bottom Layer w0.2: H_COM1.1 329.184,43.573 329.184,47.359 U8.1
  other v1: 353.187,41.275 366.395,41.402 378.968,41.402 387.35,41.402 353.211,43.688 316.992,47.117 342.011,47.371 322.592,49.796 349.631,50.546 398.399,50.8 341.388,52.717 313.429,54.118 300.101,54.483 352.691,55.003 360.565,55.003 398.399,55.499 374.027,56.388 380.53,56.388 330.835,57.658 300.101,58.293 356.362,58.432 398.399,59.563 333.883,60.071 327.914,60.452 347.23,61.468 318.897,62.611 331.851,62.865 361.95,63.881 353.06,65.405 332.613,66.294 398.526,67.31 307.848,69.85 312.42,69.85 398.399,71.12 321.576,71.997 323.735,71.997 331.863,72.086 354.833,72.11 333.768,72.124 337.578,72.124 313.309,73.025 347.841,73.025 326.402,73.105 398.526,75.438 335.153,75.692 327.152,75.946 346.075,77.216 374.027,77.597 380.276,77.597 323.735,77.978 326.021,77.978 332.625,77.978 334.784,77.978 355.346,78.232
I2C_SCL: H_I1.1 R28.1 R31.1 U7.2 | length 26.8
  Top Layer w0.254: R31.1 334.784,47.625 337.197,45.212 337.197,42.926 338.594,41.529 342.658,41.529 H_I1.1
  Bottom Layer w0.254: R28.1 340.423,45.428 341.377,44.474 342.293,44.474 343.054,45.235 343.054,46.013 343.735,46.694 U7.2 344.436,46.654 H_I1.1
I2C_SDA: H_I1.2 R30.1 R32.1 U7.3 | length 18.4
  Top Layer w0.254: R32.1 336.689,47.879 337.832,46.736 338.467,46.736 H_I1.2
  Bottom Layer w0.2: H_I1.2 343.42,41.783 344.932,41.783 345.694,42.545 345.694,45.035 R30.1
  Bottom Layer w0.254: H_I1.2 343.735,45.146 U7.3
InNegative_1: C24.1 S_N1.2 | length 8.2
  Top Layer w0.2: C24.1 390.823,47.669 391.807,48.653 S_N1.2
InNegative_2: C39.1 S_N2.2 | length 8
  Top Layer w0.2: C39.1 386.202,66.929 389.961,66.929 391.739,65.151 S_N2.2
InPlus_1: C29.1 S_P1.2 | length 12.5
  Top Layer w0.2: C29.1 387.985,53.814 387.985,58.42 389.763,60.198 390.41,60.198 S_P1.2
InPlus_2: C49.1 S_P2.2 | length 8.3
  Top Layer w0.2: C49.1 386.285,73.23 388.62,75.565 390.41,75.565 S_P2.2
Input_1: J1.1 S_N1.3 S_P1.3 | length 13
  Top Layer w0.2: S_N1.3 393.192,50.685 393.192,55.614 J1.1 393.204,59.321 394.347,60.464 S_P1.3
Input_2: J2.1 S_N2.3 S_P2.3 | length 12.8
  Top Layer w0.2: S_N2.3 393.319,66.179 393.319,71.108 J2.1 393.331,75.946 S_P2.3
Net*X1_0: *X1.0 C11.2 U3.13 | length 15.5
  Top Layer w0.254: U3.13 340.118,60.579 340.88,59.817 340.88,58.166 342.404,56.642 345.96,56.642 *X1.0
  Bottom Layer w0.254: C11.2 348.107,54.217 *X1.0
Net*X1_1: *X1.1 C12.2 U3.12 | length 10.6
  Top Layer w0.2: U3.12 339.938,60.079 340.372,59.645 340.372,57.15 *X1.1
  Bottom Layer w0.254: C12.2 343.154,54.344 *X1.1
NetC2_2: C2.2 R2.1 R3.1 U2.2 | length 13.8
  Top Layer w0.2: C2.2 354.711,44.831 353.834,45.708 U2.2 353.834,50.431 354.596,51.193 R3.1 R2.1
NetC3_2: C3.2 R3.2 U1.3 | length 8.6
  Top Layer w0.2: C3.2 352.741,56.553 R3.2 354.596,60.718 355.087,61.209 U1.3
NetC4_2: C4.2 R5.2 U1.5 | length 8.9
  Top Layer w0.2: U1.5 357.627,60.203 358.533,59.297 R5.2 360.515,56.553 C4.2
NetC15_2: C15.2 C16.2 U3.48 | length 4.8
  Top Layer w0.254: C15.2 325.962,70.497 326.228,70.231 325.653,69.656 U3.48
NetC17_2: C17.2 C18.2 U3.73 | length 6.6
  Top Layer w0.254: C17.2 320.421,49.819 C18.2 320.421,53.836 322.14,55.555 U3.73@322.279,55.555
NetC19_2: C19.2 R11.1 S1.2 U3.14 | length 21.7
  Top Layer w0.2: U3.14 340.098,61.079 v1@340.36,61.341 ; R11.1@344.081,72.517 344.589,73.025 C19.2 346.341,72.378 S1.2
  Bottom Layer w0.2: v1(340.36,61.722) 342.773,64.135 344.043,64.135 345.186,65.278 346.408,65.278 347.472,66.342 347.472,67.564 348.615,68.707 S1.2
NetC20_1: C20.1 R12.1 S_G1.2 | length 6.1
  Top Layer w0.2: R12.1 368.035,45.56 C20.1 367.985,44.892 368.808,44.069 S_G1.2
NetC21_1: C21.1 R13.1 S_G1.4 | length 7
  Top Layer w0.2: R13.1 368.035,49.751 C21.1 369.189,48.497 369.189,47.625 370.205,46.609 S_G1.4
NetC22_1: C22.1 R14.1 S_G1.6 | length 8.9
  Top Layer w0.2: R14.1 368.035,54.196 C22.1 369.316,52.815 369.316,49.911 370.078,49.149 S_G1.6
NetC23_1: C23.1 R18.1 S_G1.8 | length 10
  Top Layer w0.2: R18.1 368.035,58.514 C23.1 369.426,57.023 369.426,54.373 371.348,52.451 S_G1.8
NetC24_2: C24.2 R21.1 | length 4.9
  Top Layer w0.2: R21.1 381.287,44.704 384.463,44.704 C24.2
NetC29_2: C29.2 C30.1 R33.2 | length 8.3
  Top Layer w0.2: C30.1 381.933,49.066 383.491,50.624 C29.2 383.491,53.643 383.248,53.886 R33.2@383.248,55.88
NetC32_2: C32.2 U5.5 | length 2.9
  Top Layer w0.2: C32.2 U5.5
NetC35_1: C35.1 R36.1 S_G2.2 | length 4.7
  Top Layer w0.2: R36.1 368.035,66.642 C35.1 S_G2.2
NetC36_1: C36.1 R37.1 S_G2.4 | length 5.4
  Top Layer w0.2: R37.1 368.035,70.833 C36.1 368.664,70.104 369.934,70.104 S_G2.4
NetC37_1: C37.1 R38.1 S_G2.6 | length 6.6
  Top Layer w0.2: R38.1 368.035,75.024 C37.1 368.51,74.974 369.697,73.787 369.697,72.881 S_G2.6
NetC38_1: C38.1 R39.1 S_G2.8 | length 8.6
  Top Layer w0.2: R39.1 368.035,79.215 C38.1 369.018,79.165 370.906,77.277 S_G2.8
NetC39_2: C39.2 R40.1 | length 4.5
  Top Layer w0.2: R40.1 384.888,65.703 C39.2
NetC48_2: C48.2 DC_To_DC1.2 L1.1 | length 53.3
  Top Layer w1: DC_To_DC1.2 306.844,77.089 313.321,83.566 345.579,83.566 v1@347.738,81.407
  Bottom Layer w1: DC_To_DC1.2 306.844,73.799 C48.2
  other v1: 347.611,81.153
NetC49_2: C49.2 C50.1 R44.2 | length 9
  Top Layer w0.2: C50.1 381.459,69.894 C49.2 383.199,72.726 R44.2
NetC54_2: C54.2 U9.5 | length 3.3
  Top Layer w0.2: C54.2 374.917,83.693 U9.5
NetPot_Vb1_1: Pot_Vb1.1 R5.1 | length 9.5
  Top Layer w0.2: R5.1 358.533,48.133 Pot_Vb1.1
NetR1_1: R1.1 U1.2 | length 5.9
  Top Layer w0.2: R1.1 353.53,58.128 353.817,58.415 U1.2
NetR4_1: R4.1 U1.6 | length 4.9
  Top Layer w0.2: U1.6 358.897,59.695 359.156,59.436 359.753,59.436 R4.1
NetR6_1: R6.1 U1.9 | length 5.2
  Top Layer w0.2: U1.9 358.897,71.623 359.384,72.11 R6.1
NetR6_2: R6.2 U1.8 | length 2.6
  Top Layer w0.2: U1.8 R6.2
NetR7_2: R7.2 U1.10 | length 2.7
  Top Layer w0.2: R7.2 357.627,70.383 U1.10
NetR8_1: R8.1 U1.13 | length 5.1
  Top Layer w0.2: R8.1 352.959,72.11 353.568,71.501 353.568,69.596 353.817,69.347 U1.13
NetR8_2: R8.2 U1.14 | length 2.7
  Top Layer w0.2: R8.2 352.42,67.995 U1.14
NetR9_2: R9.2 U1.12 | length 2.7
  Top Layer w0.2: R9.2 355.087,70.256 U1.12
NetR10_1: R10.1 U3.94 | length 6.7
  Top Layer w0.2: U3.94 333.653,51.967 333.785,51.835 334.436,51.835 334.636,51.635 335.899,51.635 336.477,51.057 337.855,51.057 R10.1
NetR15_2: R15.2 U3.22 | length 4.9
  Top Layer w0.2: U3.22 338.34,65.072 340.166,65.072 342.15,67.056 R15.2
NetR16_2: R16.2 U3.23 | length 5.9
  Top Layer w0.2: U3.23 339.911,65.579 341.515,67.183 341.515,67.894 R16.2
NetR17_2: R17.2 U3.24 | length 7.1
  Top Layer w0.2: U3.24 339.769,66.079 341.061,67.371 341.061,68.082 341.388,68.409 341.388,69.545 R17.2
NetR23_1: R23.1 U3.78 | length 6.6
  Top Layer w0.2: U3.78 325.653,51.029 326.54,50.142 R23.1
NetR24_1: R24.1 U3.79 | length 7.6
  Top Layer w0.2: U3.79 326.153,51.545 326.644,51.054 330.974,51.054 R24.1
NetR25_2: R25.2 U3.72 | length 14.6
  Top Layer w0.254: v1(313.194,48.768) 320.489,56.063 U3.72@322.739,56.063
  Bottom Layer w0.254: R25.2 312.559,48.133 v1(313.194,48.768)
NetR26_2: R26.2 U3.76 | length 9.1
  Top Layer w0.254: v1(322.211,47.879) 323.227,47.879 324.653,49.305 U3.76
  Bottom Layer w0.254: R26.2 320.903,47.879 v1(322.211,47.879)
NetR31_2: R31.2 U3.92 | length 4.1
  Top Layer w0.2: U3.92 332.653,51.522 333.248,50.927 334.06,50.927 R31.2
NetR32_2: R32.2 U3.93 | length 5.6
  Top Layer w0.2: U3.93 333.153,51.784 333.556,51.381 334.248,51.381 334.448,51.181 335.711,51.181 R32.2 R32.2@336.385,50.203
NetR35_2: R35.2 U3.53 | length 4.8
  Top Layer w0.2: v1(319.405,67.818) 320.294,66.929 320.294,66.421 321.136,65.579 U3.53
Op1_Neg: C25.1 R21.2 R22.1 S_G1.1 S_G1.3 S_G1.5 S_G1.7 U5.2 | length 31.8
  Top Layer w0.2: S_G1.7 S_G1.5 S_G1.3 S_G1.1 376.936,44.069 378.377,45.51 R21.2 377.444,46.947 377.444,49.276 378.956,50.788 C25.1 378.956,53.417 R22.1 379.73,53.467 381.562,55.299 381.562,57.01 381.381,57.191 381.381,59.69 381.127,59.944 U5.2
Op1_out: C20.2 C21.2 C22.2 C23.2 C25.2 R12.2 R13.2 R14.2 R18.2 R22.2 R29.2 U5.6 | length 84.3
  Top Layer w0.2: R29.2@335.546,72.402 R29.2 336.832,73.46 343.081,73.46 344.932,75.311 362.585,75.311 364.871,73.025 364.871,63.056 366.681,61.246 ; C20.2 366.485,47.238 R12.2 366.435,49.651 C21.2 366.435,49.751 R13.2 366.485,51.529 C22.2 366.435,54.196 R14.2 366.485,55.974 C23.2 366.435,58.514 R18.2 366.435,61 366.681,61.246 ; U5.6 375.1,61.246 368.682,61.246 ; C25.2 377.406,51.485 R22.2 375.628,55.245 371.983,55.245 368.889,58.339 368.889,61.039 368.682,61.246 ; 366.681,61.246 368.682,61.246
Op1_Pos: C30.2 R34.2 U5.3 | length 16.2
  Top Layer w0.2: C30.2 379.393,49.066 382.016,51.689 382.016,59.059 382.691,59.734 381.211,61.214 U5.3
Op2_Neg: C40.1 R40.2 R41.1 S_G2.1 S_G2.3 S_G2.5 S_G2.7 U9.2 | length 31.4
  Top Layer w0.2: S_G2.7 S_G2.5 ; R40.2 377.146,65.703 376.257,66.592 S_G2.1 S_G2.3 S_G2.5 ; U9.2 381.254,80.899 381.508,80.645 381.508,76.581 379.857,74.93 R41.1 378.448,74.88 C40.1 378.448,71.87 377.952,71.374 373.744,71.374 S_G2.5
Op2_out: C35.2 C36.2 C37.2 C38.2 C40.2 R36.2 R37.2 R38.2 R39.2 R41.2 R43.2 U9.6 | length 78.3
  Top Layer w0.2: R43.2 330.085,73.291 330.708,73.914 342.773,73.914 344.678,75.819 363.347,75.819 365.506,73.66 366.485,73.66 ; C35.2 366.435,66.642 R36.2 R37.2 366.485,72.611 366.485,73.66 ; U9.6 369.697,82.169 ; C40.2 376.948,74.88 R41.2 375.628,76.2 372.237,76.2 371.856,76.581 371.856,77.216 369.189,79.883 369.189,81.661 369.697,82.169 ; 366.485,73.66 C37.2 366.435,75.024 R38.2 366.485,76.802 C38.2 366.435,79.215 R39.2 366.435,81.828 366.776,82.169 369.697,82.169
Op2_Pos: C50.2 R45.2 U9.3 | length 16.8
  Top Layer w0.2: C50.2 382.016,73.626 382.016,79.76 R45.2 382.861,80.943 381.635,82.169 U9.3
OpAmpEn1: C27.2 R15.1 R27.2 U5.8 | length 9.9
  Top Layer w0.2: R15.1 v1(345.821,67.056) ; U5.8 376.555,58.674 R27.2@378.841,56.388 ; C27.2 v1(377.184,56.388) R27.2@378.841,56.388 ; R27.2 R27.2@378.841,56.388
OpAmpEn2: C42.2 R16.1 R42.2 U9.8 | length 9.3
  Top Layer w0.2: R16.1 v1(345.821,68.834) ; U9.8 376.644,79.629 R42.2 v1(377.101,77.597) C42.2
OpAmpEn3: R17.1 | length 1.8
  Top Layer w0.2: R17.1 v1(345.821,70.612)
SWCLK: H_Program1.1 R26.1 U6.2 | length 5.3
  Bottom Layer w0.254: H_Program1.1 317.385,45.008 U6.2 320.029,45.405 R26.1
SWDIO: H_Program1.2 R25.1 U6.3 | length 4.6
  Bottom Layer w0.254: R25.1 312.582,45.405 U6.3 314.845,45.262 H_Program1.2
UART_DE: R35.1
UART_Rx: H_COM1.0 R20.1 R24.2 U8.2 | length 12.5
  Top Layer w0.2: R24.2 333.756,46.672 333.756,45.073 H_COM1.0
  Bottom Layer w0.2: U8.2 332.255,46.56 R20.1
  Bottom Layer w0.254: H_COM1.0 331.99,45.809 R20.1
UART_Tx: H_COM1.2 R19.1 R23.2 U8.3 | length 12.8
  Top Layer w0.2: H_COM1.2 329.057,45.454 329.057,47.558 R23.2
  Bottom Layer w0.2: R19.1 328.074,46.571 U8.3
  Bottom Layer w0.254: H_COM1.2 328.085,44.482 U8.3
UBS_DN: S_PC1.1 U3.70 U4.3 | length 18.2
  Top Layer w0.254: S_PC1.1 314.337,58.039 315.129,57.247 U4.3 316.09,57.079 U3.70
UBS_DP: S_PC1.2 U3.71 U4.2 | length 25.6
  Top Layer w0.254: S_PC1.2 305.193,56.896 305.193,53.721 306.59,52.324 314.591,52.324 315.129,52.862 U4.2 317.582,56.571 U3.71@322.973,56.571
USB_VCC: C28.1 R46.1 R47.1 R48.1 S_PC1.0 U4.4 | length 59.5
  Top Layer w0.254: S_PC1.0 311.035,55.499 311.654,56.118 U4.4
  Top Layer w1: R46.1 v1(321.576,78.994) ; R48.1 v1(330.339,78.994)
  Bottom Layer w1: R47.1 312.432,64.77 315.48,67.818 315.48,73.152 318.782,76.454 318.782,77.978 319.798,78.994 v1(321.576,78.994) 322.211,79.629 329.704,79.629 v1(330.339,78.994)
  Bottom Layer w1.5: S_PC1.0 309.384,55.499 314.123,60.238 C28.1 312.432,63.794 312.432,64.77
V_Bias: C33.2 C55.2 R4.2 R34.1 R45.1 U1.7 | length 64.9
  Top Layer w0.2: U1.7 U1.7@360.172,63.063 ; R4.2 U1.7@360.172,63.063 ; v1(362.331,61.976) 361.259,61.976 U1.7@360.172,63.063 ; R34.1@384.291,59.734 384.512,59.734 384.798,59.448 C33.2@384.798,57.785 ; C33.2 385.572,57.658 v1@386.461,58.547 ; R45.1 384.749,80.893 C55.2 385.743,79.038 v1(386.461,79.756)
  Bottom Layer w0.2: v1(362.331,61.976) 363.855,61.976 370.459,55.372 385.699,55.372 386.334,56.007 v1(386.334,58.293) 387.096,59.055 387.096,71.801 387.114,71.819 387.114,72.523 386.461,73.176 v1(386.461,79.756)
VACC_IN: C57.1 LD2.3 R48.2 | length 2.4
  Top Layer w1: R48.2 330.516,76.339 C57.1
  other v1: 330.339,75.565
VADD_IN: C43.1 LD1.3 R46.2 | length 2.2
  Top Layer w1: R46.2 321.626,76.313 C43.1
  other v1: 321.449,75.692
VANALOG_IN: C47.2 DC_To_DC1.1 L2.1 R47.2 | length 77.9
  Top Layer w1: DC_To_DC1.1 304.939,74.676 304.939,78.105 311.797,84.963 354.215,84.963 v1(357.263,81.915)
  Bottom Layer w1: C47.2 306.221,72.124 DC_To_DC1.1 301.853,71.59 301.853,69.215 R47.2
Vref_2V5: C13.2 C14.2 Pot_Vb1.0 R1.2 U1.1 U3.20 | length 44.9
  Top Layer w0.2: U3.20 341.686,64.079 ; C13.2@342.324,62.611 342.324,63.441 341.686,64.079 ; R1.2 352.547,59.872 U1.1 350.947,61.468 C14.2 348.73,61.861 346.517,64.074 341.84,64.074 341.835,64.079 341.686,64.079
  Bottom Layer w0.2: v1(350.774,61.595) 351.282,61.087 351.282,52.705 352.806,51.181 355.727,51.181 357.886,49.022 357.886,46.24 Pot_Vb1.0
pads on no net: U2.3 U3.1 U3.2 U3.3 U3.4 U3.5 U3.6 U3.7 U3.8 U3.9 U3.15 U3.16 U3.18 U3.25 U3.28 U3.29 U3.31 U3.33 U3.34 U3.35 U3.36 U3.37 U3.38 U3.39 U3.40 U3.41 U3.42 U3.43 U3.44 U3.45 U3.46 U3.47 U3.51 U3.52 U3.54 U3.55 U3.56 U3.57 U3.58 U3.59 U3.60 U3.61 U3.62 U3.63 U3.64 U3.65 U3.66 U3.67 U3.68 U3.69 U3.77 U3.80 U3.81 U3.82 U3.83 U3.84 U3.85 U3.86 U3.87 U3.88 U3.89 U3.90 U3.91 U3.95 U3.96 U3.97 U3.98

## Polygon pours and split planes (outlines as drawn)
GND on Bottom Layer "Top Layer-No Net" (solid, pour order 2): 298.323,86.487 298.323,40.005 400.304,40.005 400.304,86.487
GND on Top Layer "Top Layer-No Net" (solid, pour order 4): 298.335,86.487 298.335,40.005 400.316,40.005 400.316,86.487

## Silkscreen, mask and mechanical layers (free items; w line width, h text height)
Mechanical 1:
  the board outline again, w0.254

## Text inside footprints (layer, text, board x,y; h text height)
C28: Top Overlay "+" at 316.738,56.263 h1.5 r90
C45: Top Overlay "+" at 320.221,80.633 h1.5 r180
C52: Top Overlay "+" at 349.909,85.767 h1.5 r270
C59: Top Overlay "+" at 340.511,83.862 h1.5 r270
C62: Top Overlay "+" at 359.434,85.767 h1.5 r270
S_G1: Top Overlay "8" at 371.856,53.213 h1.27 r90; Top Overlay "7" at 374.396,53.213 h1.27 r90; Top Overlay "1" at 374.396,42.037 h1.27 r90; Top Overlay "2" at 371.729,41.91 h1.27 r90
S_G2: Top Overlay "8" at 371.414,75.736 h1.27 r90; Top Overlay "7" at 373.954,75.736 h1.27 r90; Top Overlay "1" at 373.954,64.56 h1.27 r90; Top Overlay "2" at 371.414,64.433 h1.27 r90
U2: Top Overlay "3" at 354.301,45.458 h1.5 r270; Top Overlay "1" at 351.855,45.458 h1.5 r270